# EAGLE board board (EAGLE 9.7.0)
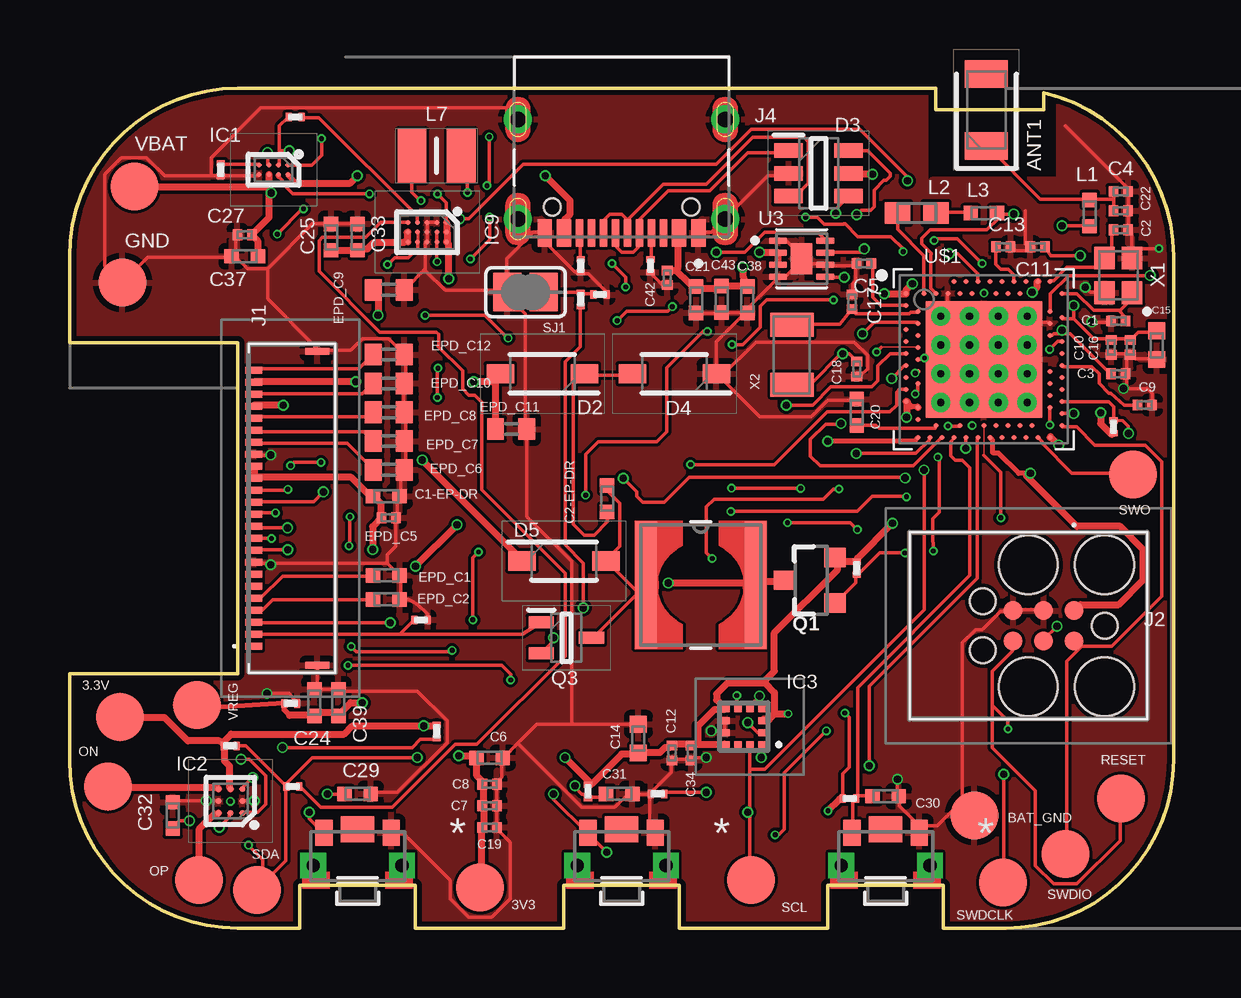
[diagram p0: board, top side]
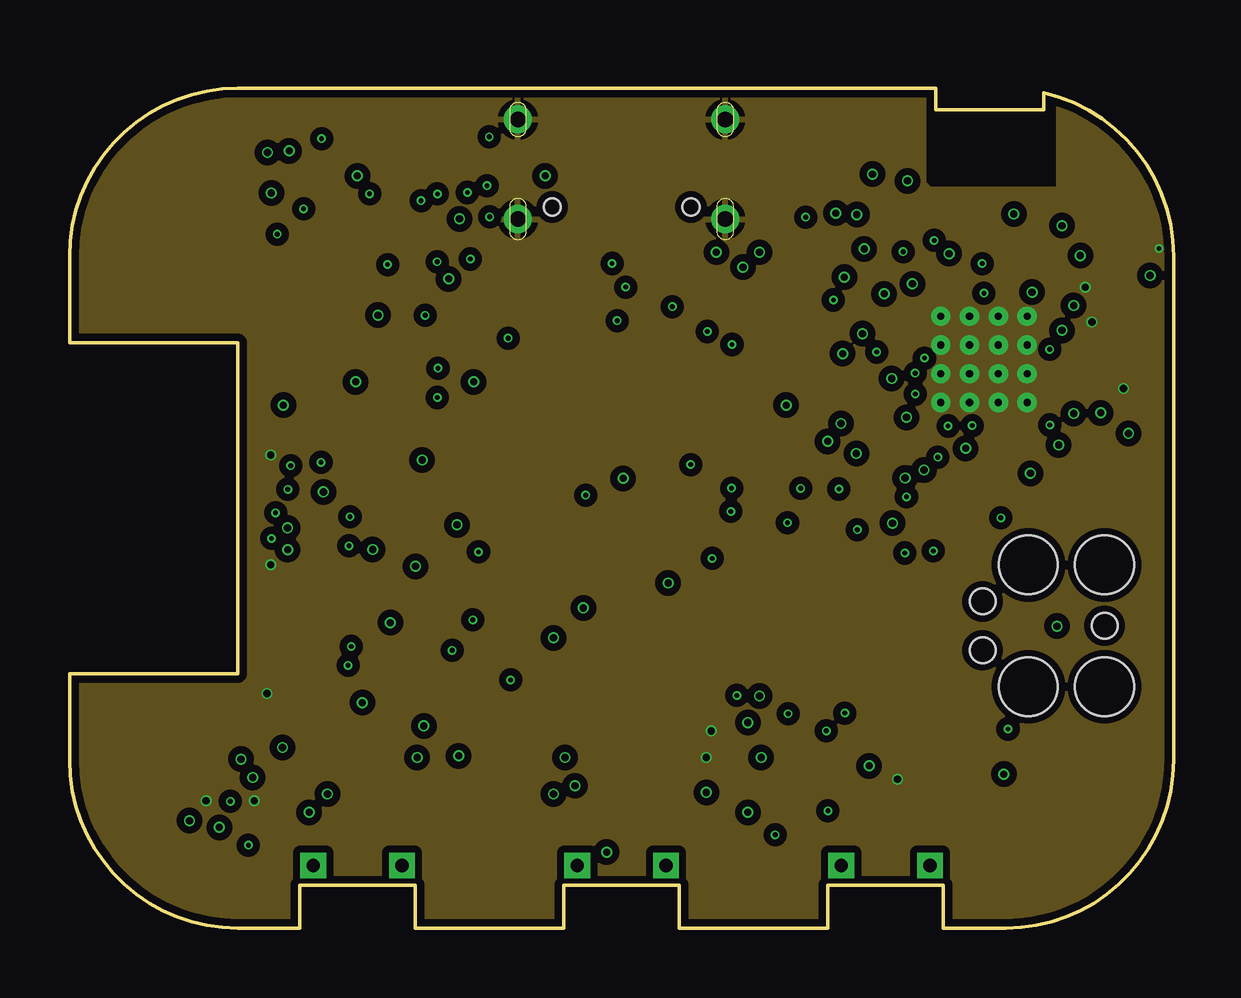
[diagram p1: board, inner layer Route2]
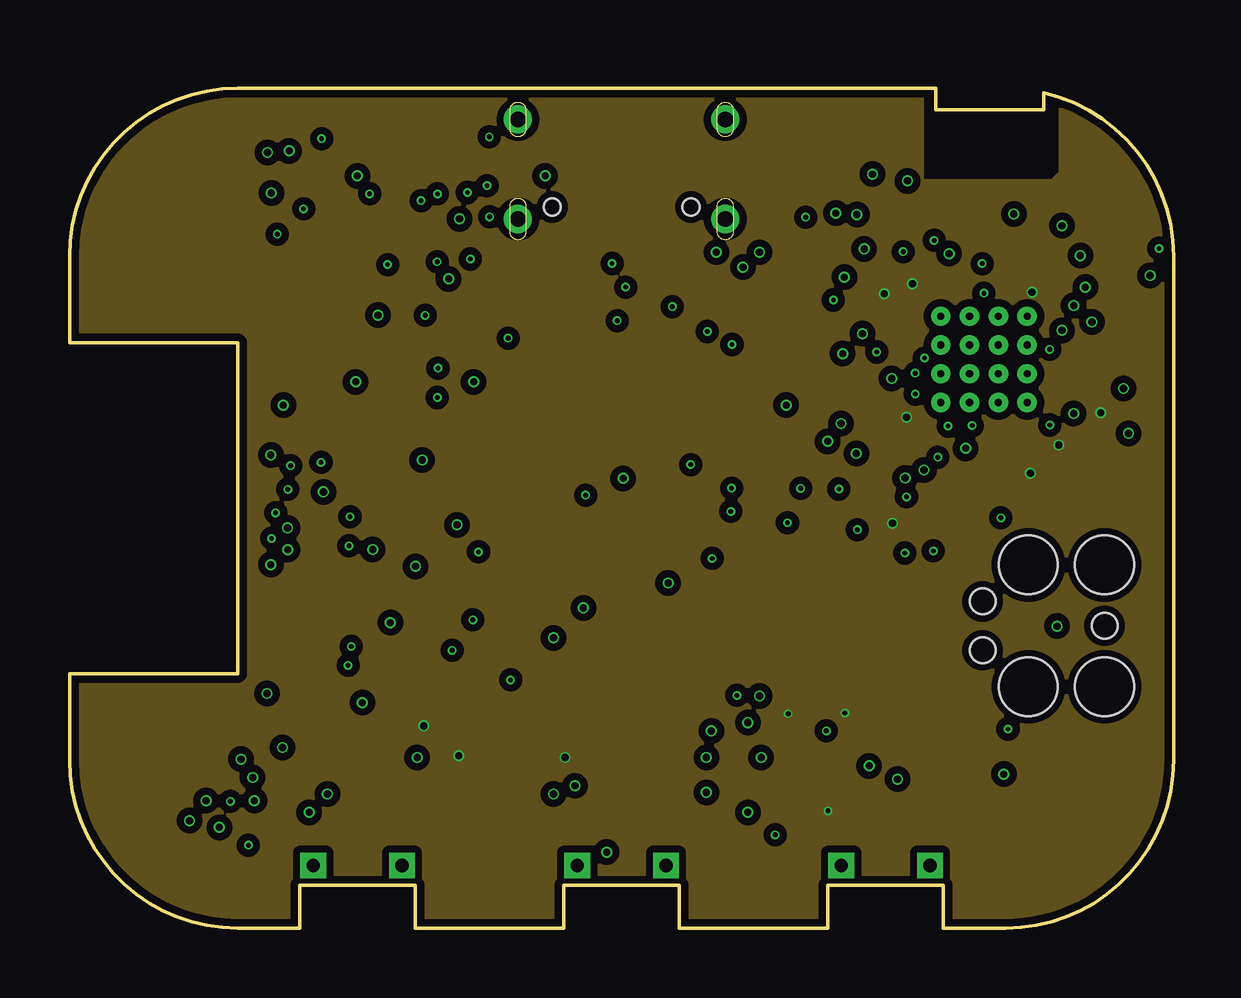
[diagram p2: board, inner layer Route15]
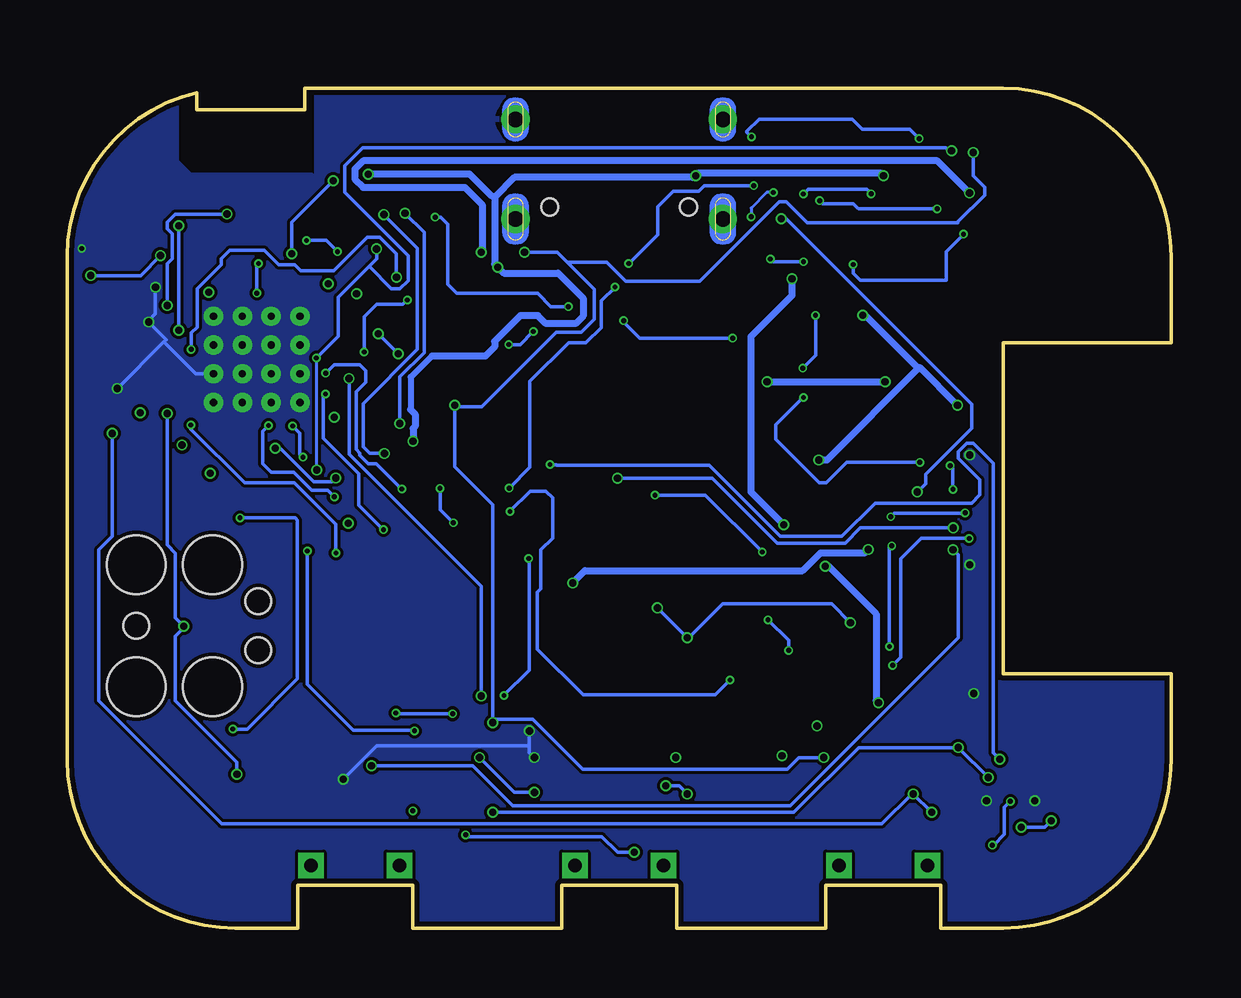
[diagram p3: board, bottom side, seen from below]

Size 46 x 35 mm. Coordinates in mm from the lower left corner, seen from the top.
Outline: 0,10.6 0,7 arc90 7,0 9.6,0 9.6,1.8 14.4,1.8 14.4,0 20.6,0 20.6,1.8 25.4,1.8 25.4,0 31.6,0 31.6,1.8 36.4,1.8 36.4,0 39,0 arc90 46,7 46,28 arc77 40.6,34.81 40.6,34.1 36.1,34.1 36.1,35 7,35 arc90 0,28 0,24.4 7,24.4 7,10.6 0,10.6
Copper layers (1+2*15+16): Top 0.035mm / dielectric 1.6mm / Route2 0.035mm / dielectric 0.15mm / Route15 0.035mm / dielectric 0.2mm / Bottom 0.035mm
Design rules "jlcpcb-2layers.dru *": minimum track width 5mil, minimum drill 0.2mm, track to track 5mil, track to pad 5mil, pad to pad 5mil, via to via 5mil, smd to smd 5mil, copper to edge 0.2mm, drill to drill 6mil, minimum pad ring 10mil, minimum via ring 3mil, stop-mask expansion 4mil, vias tented up to drill 999mm, thermal gap 10mil
Net classes: 0 default: width 0.15 mm; 1 HIGH_CURRENT: width 0.3 mm

## Footprints (pad centres in the part's own frame; a part is rotated, then mirrored left to right if it is on the bottom)
HECTOR_WATCH_1_TP20R = smd 2 x 2: TP 0,0
2450AT18B100E_ANTC3216X140N = smd 1.15 x 1.8: 1 -1.5,0; 2 1.5,0
NORDIC_NRF_3_RESC0201_N = smd 0.4 x 0.45: 1 -0.305,0; 2 0.305,0
NORDIC_NRF_3_RESC0402_N = smd 0.6 x 0.6: 1 -0.55,0; 2 0.55,0
NORDIC_NRF_3_RESC0402_M = smd 0.7 x 0.7: 1 -0.6,0; 2 0.6,0
GRM011R60J152KE01L_1_0201 = smd 0.35 x 0.25: 1 0,0.275; 2 0,-0.275
ESP32_C6_LIBRARY_5_SOD3716X135N = smd 1.15 x 0.8: 1 -1.75,0; 2 1.75,0
ESP32_C6_LIBRARY_3_SOT95P280X145-6N = smd 1.2 x 0.6: 1 -1.25,0.95; 2 -1.25,0; 3 -1.25,-0.95; 4 1.25,-0.95; 5 1.25,0; 6 1.25,0.95
ESP32_C6_LIBRARY_1_ESP32_WROVER_EAGLE-LTSPICE_C0402 = smd 0.7 x 0.9: 1 -0.65,0; 2 0.65,0
BQ25180YBGR_BGA8C40P2X4_100X155X50 = smd 0.2 x 0.2: A1 -0.2,0.6; A2 0.2,0.6; B1 -0.2,0.2; B2 0.2,0.2; C1 -0.2,-0.2; C2 0.2,-0.2; D1 -0.2,-0.6; D2 0.2,-0.6
DRV2605YZFR_BGA9C50P3X3_144X144X62 = smd 0.25 x 0.25: A1 -0.5,0.5; A2 0,0.5; A3 0.5,0.5; B1 -0.5,0; B2 0,0; B3 0.5,0; C1 -0.5,-0.5; C2 0,-0.5; C3 0.5,-0.5
BMA423_BMA423 = smd 0.3 x 0.35: 1 -0.75,-0.775; 2 -0.25,-0.775; 3 0.25,-0.775; 4 0.75,-0.775; 7 0.75,0.775; 8 0.25,0.775; 9 -0.25,0.775; 10 -0.75,0.775 | smd 0.35 x 0.3: 5 0.775,-0.25; 6 0.775,0.25; 11 -0.775,0.25; 12 -0.775,-0.25
RT6160AWSC_BGA15C40P3X5_140X230X60 = smd 0.216 x 0.216: A1 -0.4,0.8; A2 0,0.8; A3 0.4,0.8; B1 -0.4,0.4; B2 0,0.4; B3 0.4,0.4; C1 -0.4,0; C2 0,0; C3 0.4,0; D1 -0.4,-0.4; D2 0,-0.4; D3 0.4,-0.4; E1 -0.4,-0.8; E2 0,-0.8; E3 0.4,-0.8
503480-2400_5034802400 = smd 0.3 x 0.7: 1 -5.75,1.525; 2 -5.25,1.525; 3 -4.75,1.525; 4 -4.25,1.525; 5 -3.75,1.525; 6 -3.25,1.525; 7 -2.75,1.525; 8 -2.25,1.525; 9 -1.75,1.525; 10 -1.25,1.525; 11 -0.75,1.525; 12 -0.25,1.525; 13 0.25,1.525; 14 0.75,1.525; 15 1.25,1.525; 16 1.75,1.525; 17 2.25,1.525; 18 2.75,1.525; 19 3.25,1.525; 20 3.75,1.525; 21 4.25,1.525; 22 4.75,1.525; 23 5.25,1.525; 24 5.75,1.525 | smd 0.3 x 1: MP1 -6.54,-1.125; MP2 6.54,-1.125
TC2030-IDC_TC2030IDC = smd 0.783 x 0.783: 1 -0.953,-0.635; 2 -0.953,0.635; 3 0.317,-0.635; 4 0.317,0.635; 5 1.588,-0.635; 6 1.588,0.635 | hole 2.451: -2.223,-2.54; -2.223,2.54; 0.952,-2.54; 0.952,2.54 | hole 1.067: -2.223,0; 2.857,-1.016; 2.857,1.016
KH-TYPE-C-16P_KINGHELM_KH-TYPE-C-16P = smd 0.6 x 1.15: A1_B12 -3.2,4.725; A4_B9 -2.4,4.725; A9_B4 2.4,4.725; A12_B1 3.2,4.725 | smd 0.3 x 1.15: A5 -1.25,4.725; A6 -0.25,4.725; A7 0.25,4.725; A8 1.25,4.725; B5 1.75,4.725; B6 0.75,4.725; B7 -0.75,4.725; B8 -1.75,4.725 | drill 0.65 pad 1.05: SH1 -4.32,0; SH2 4.32,0; SH3 -4.32,4.15; SH4 4.32,4.15 | hole 0.7: -2.89,3.65; 2.89,3.65
NORDIC_NRF_2_RESC0402_N = smd 0.6 x 0.6: 1 -0.55,0; 2 0.55,0
NORDIC_NRF_2_RESC0603_N = smd 1.05 x 0.9: 1 -0.8,0; 2 0.8,0
ESP32_C6_LIBRARY_2_IND_4828-WE-TPC_WRE = smd 0.9 x 5.3: 1 -2.286,0; 2 2.286,0
MLP2016SR47MT0S1_INDC2016X100N = smd 1.2 x 2.2: 1 -1.028,0; 2 1.028,0
ESP32_C6_LIBRARY_4_ESP32_C6_LIBRARY_4_ESP32_C6_LIBRARY_4_ESP32_C6_LIBRARY_4_ESP32_WROVER_SPARKFUN-DISCRETESEMI_SOT23-3 = smd 0.8 x 0.9: 1 -0.95,-1; 2 0.95,-1; 3 0,1.1
ESP32_C6_LIBRARY_6_SOT65P210X110-3N = smd 1.05 x 0.5: 1 -1.05,0.65; 2 -1.05,-0.65; 3 1.05,0
ERA-1AEB3401C_0201 = smd 0.35 x 0.25: 1 0,0.275; 2 0,-0.275
CPF0201D7K68C1_0201 = smd 0.35 x 0.25: 1 0,0.275; 2 0,-0.275
ESP32_C6_LIBRARY_7_JUMPER_SJ = smd 1.168 x 1.6: 1 -0.762,0; 2 0.762,0
2025-10-22_07-23-44_LIBRARY_SW_EVP-AKE31A_PAN = smd 0.711 x 1.092: 1 -1.4,-0.972; 2 1.4,-0.972 | drill 0.559 pad 0.914 square: 3 -1.848,0.381; 4 1.848,0.381 | smd 1.397 x 1.092: 5 0,-1.124
ESP32_C6_LIBRARY_SON50P200X200X80-9N = smd 0.76 x 0.27: 1 -0.985,0.75; 2 -0.985,0.25; 3 -0.985,-0.25; 4 -0.985,-0.75; 5 0.985,-0.75; 6 0.985,-0.25; 7 0.985,0.25; 8 0.985,0.75 | smd 0.9 x 1.3: 9 0,0
NORDIC_NRF_4_AQFN50P700X700X85_HS-74N = smd 4.85 x 4.85: P$74 0,0 | drill 0.3 pad 0.6: P$75 -1.8,1.8; P$76 -0.6,1.8; P$77 0.6,1.8; P$78 1.8,1.8; P$79 -1.8,0.6; P$80 -0.6,0.6; P$81 0.6,0.6; P$82 1.8,0.6; P$83 -1.8,-0.6; P$84 -0.6,-0.6; P$85 0.6,-0.6; P$86 1.8,-0.6; P$87 -1.8,-1.8; P$88 -0.6,-1.8; P$89 0.6,-1.8; P$90 1.8,-1.8 | smd 0.2 x 0.2: P$A8 -1.25,3.25; P$A10 -0.75,3.25; P$A12 -0.25,3.25; P$A14 0.25,3.25; P$A16 0.75,3.25; P$A18 1.25,3.25; P$A20 1.75,3.25; P$A22 2.25,3.25; P$A23 2.75,3.25; P$AA24 3.25,-2.25; P$AB2 -2.75,-2.5; P$AC5 -2,-2.75; P$AC9 -1,-2.75; P$AC11 -0.5,-2.75; P$AC13 0,-2.75; P$AC15 0.5,-2.75; P$AC17 1,-2.75; P$AC19 1.5,-2.75; P$AC21 2,-2.75; P$AC24 3.25,-2.75; P$AD2 -2.75,-3.25; P$AD4 -2.25,-3.25; P$AD6 -1.75,-3.25; P$AD8 -1.25,-3.25; P$AD10 -0.75,-3.25; P$AD12 -0.25,-3.25; P$AD14 0.25,-3.25; P$AD16 0.75,-3.25; P$AD18 1.25,-3.25; P$AD20 1.75,-3.25; P$AD22 2.25,-3.25; P$AD23 2.75,-3.25; P$B1 -3.25,2.75; P$B3 -2.5,2.75; P$B5 -2,2.75; P$B7 -1.5,2.75; P$B9 -1,2.75; P$B11 -0.5,2.75; P$B13 0,2.75; P$B15 0.5,2.75; P$B17 1,2.75; P$B19 1.5,2.75; P$B24 3.25,2.75; P$C1 -3.25,2.25; P$D2 -2.75,2; P$D23 2.75,2; P$E24 3.25,1.75; P$F2 -2.75,1.5; P$F23 2.75,1.5; P$G1 -3.25,1.25; P$H2 -2.75,1; P$H23 2.75,1; P$J1 -3.25,0.75; P$J24 3.25,0.75; P$K2 -2.75,0.5; P$L1 -3.25,0.25; P$L24 3.25,0.25; P$M2 -2.75,0; P$N1 -3.25,-0.25; P$N24 3.25,-0.25; P$P2 -2.75,-0.5; P$P23 2.75,-0.5; P$R1 -3.25,-0.75; P$R24 3.25,-0.75; P$T2 -2.75,-1; P$T23 2.75,-1; P$U1 -3.25,-1.25; P$U24 3.25,-1.25; P$V23 2.75,-1.5; P$W1 -3.25,-1.75; P$W24 3.25,-1.75; P$Y2 -2.75,-2; P$Y23 2.75,-2
NORDIC_NRF_BT-XTAL_2016_N = smd 0.95 x 0.85: 1 -0.725,-0.575; 2 0.725,-0.575; 3 0.725,0.575; 4 -0.725,0.575
NORDIC_NRF_1_XTAL_3215_N = smd 1 x 1.8: 1 -1.25,0; 2 1.25,0

## Placement (x,y rotation side)
3.3V  HECTOR_WATCH_1_TPTP20R  [HECTOR_WATCH_1_TP20R]  2.1,8.8 0 top
3V3  HECTOR_WATCH_1_TPTP20R  [HECTOR_WATCH_1_TP20R]  17.1,1.7 0 top
ANT1  2450AT18B100E  [2450AT18B100E_ANTC3216X140N]  38.2,34.1 90 top
BAT_GND  HECTOR_WATCH_1_TPTP20R  [HECTOR_WATCH_1_TP20R]  37.7,4.7 0 top
C1  12pF  [NORDIC_NRF_3_RESC0201_N]  43.7,25.3 180 top
C1-EP-DR  10uF  [NORDIC_NRF_3_RESC0402_N]  13.2,18 0 top
C2  12pF  [NORDIC_NRF_3_RESC0201_N]  43.8,29.1 0 top
C2-EP-DR  4.7uF/25V  [NORDIC_NRF_3_RESC0402_N]  22.4,17.9 90 top
C3  1pF  [NORDIC_NRF_3_RESC0201_N]  43.7,23.1 0 top
C4  1pF  [NORDIC_NRF_3_RESC0201_N]  43.8,30.7 0 top
C5  100nF  [NORDIC_NRF_3_RESC0201_N]  33.1,27.7 180 top
C6  4.7µF  [NORDIC_NRF_3_RESC0402_N]  17.5,7.1 0 top
C7  100nF  [NORDIC_NRF_3_RESC0201_N]  17.5,5.1 0 top
C8  100nF  [NORDIC_NRF_3_RESC0201_N]  17.5,6 0 top
C9  820pF N.C.  [NORDIC_NRF_3_RESC0201_N]  44.8,21.8 0 top
C10  N.C  [NORDIC_NRF_3_RESC0201_N]  43.4,24.2 270 top
C11  100pF  [NORDIC_NRF_3_RESC0201_N]  40.34,28.39 180 top
C12  100nF  [NORDIC_NRF_3_RESC0201_N]  25.1,7.3 270 top
C13  N.C  [NORDIC_NRF_3_RESC0201_N]  38.9,28.39 0 top
C14  4.7µF  [NORDIC_NRF_3_RESC0402_M]  23.7,7.9 90 top
C15  1.0µF  [NORDIC_NRF_3_RESC0402_M]  45.3,24.3 270 top
C16  47nF  [NORDIC_NRF_3_RESC0201_N]  44.2,24.2 270 top
C17  12pF  [NORDIC_NRF_3_RESC0201_N]  32.6,26.1 270 top
C18  12pF  [NORDIC_NRF_3_RESC0201_N]  32.8,23.3 90 top
C19  100nF  [NORDIC_NRF_3_RESC0201_N]  17.5,4.2 0 top
C20  4.7µF  [NORDIC_NRF_3_RESC0402_N]  32.8,21.5 90 top
C21  4.7µF  [NORDIC_NRF_3_RESC0402_N]  26.11,26.19 270 top
C22  N.C.  [NORDIC_NRF_3_RESC0201_N]  43.8,29.9 0 top
C23  0.1uF  [GRM011R60J152KE01L_1_0201]  9.21,9.37 270 top
C24  10uF  [NORDIC_NRF_3_RESC0402_N]  10.2,9.4 270 top
C25  22uF  [NORDIC_NRF_3_RESC0402_N]  10.9,28.8 90 top
C27  0.1uF  [NORDIC_NRF_3_RESC0201_N]  7.3,28.9 180 top
C29  1uF  [NORDIC_NRF_3_RESC0402_N]  12,5.6 0 top
C30  1uF  [NORDIC_NRF_3_RESC0402_N]  34,5.5 0 top
C31  1uF  [NORDIC_NRF_3_RESC0402_N]  22.9,5.6 0 top
C32  1uF  [NORDIC_NRF_3_RESC0402_N]  4.3,4.7 90 top
C33  22uF  [NORDIC_NRF_3_RESC0402_N]  12,28.8 90 top
C34  0.1uF  [NORDIC_NRF_3_RESC0201_N]  25.9,7.3 270 top
C37  1uF  [NORDIC_NRF_3_RESC0402_N]  7.3,28 180 top
C38  1uF  [NORDIC_NRF_3_RESC0402_N]  28.25,26.19 270 top
C39  10uF  [NORDIC_NRF_3_RESC0402_N]  11.2,9.4 90 top
C42  0.1uF  [NORDIC_NRF_3_RESC0201_N]  24.9,27.1 270 top
C43  4.7uF  [NORDIC_NRF_3_RESC0402_N]  27.17,26.2 270 top
D2  MBR0530  [ESP32_C6_LIBRARY_5_SOD3716X135N]  19.7,23.1 180 top
D3  ESP32_C6_LIBRARY_3_USBLC6-2SC6Y  [ESP32_C6_LIBRARY_3_SOT95P280X145-6N]  31.21,31.45 0 top
D4  MBR0530  [ESP32_C6_LIBRARY_5_SOD3716X135N]  25.2,23.1 180 top
D5  MBR0530  [ESP32_C6_LIBRARY_5_SOD3716X135N]  20.6,15.3 0 top
EPD_C1  1uF/50V  [NORDIC_NRF_3_RESC0402_N]  13.2,14.7 180 top
EPD_C2  1uF/50V  [NORDIC_NRF_3_RESC0402_N]  13.2,13.7 180 top
EPD_C5  0.1uF/50V  [NORDIC_NRF_3_RESC0201_N]  13.3,17.1 180 top
EPD_C6  1uF/50V  [ESP32_C6_LIBRARY_1_ESP32_WROVER_EAGLE-LTSPICE_C0402]  13.3,19.1 180 top
EPD_C7  1uF/50V  [ESP32_C6_LIBRARY_1_ESP32_WROVER_EAGLE-LTSPICE_C0402]  13.3,20.3 180 top
EPD_C8  1uF/50V  [ESP32_C6_LIBRARY_1_ESP32_WROVER_EAGLE-LTSPICE_C0402]  13.3,21.5 180 top
EPD_C9  1uF/50V  [ESP32_C6_LIBRARY_1_ESP32_WROVER_EAGLE-LTSPICE_C0402]  13.3,26.6 180 top
EPD_C10  1uF/50V  [ESP32_C6_LIBRARY_1_ESP32_WROVER_EAGLE-LTSPICE_C0402]  13.3,22.7 180 top
EPD_C11  1uF/50V  [ESP32_C6_LIBRARY_1_ESP32_WROVER_EAGLE-LTSPICE_C0402]  18.4,20.8 180 top
EPD_C12  1uF/50V  [ESP32_C6_LIBRARY_1_ESP32_WROVER_EAGLE-LTSPICE_C0402]  13.3,23.9 180 top
GND  HECTOR_WATCH_1_TPTP20R  [HECTOR_WATCH_1_TP20R]  2.2,26.9 0 top
IC1  BQ25180YBGR  [BQ25180YBGR_BGA8C40P2X4_100X155X50]  8.5,31.6 270 top
IC2  DRV2605YZFR  [DRV2605YZFR_BGA9C50P3X3_144X144X62]  6.7,5.3 180 top
IC3  BMA423  [BMA423_BMA423]  28.1,8.4 90 top
IC9  RT6160AWSC  [RT6160AWSC_BGA15C40P3X5_140X230X60]  14.9,29 270 top
J1  503480-2400  [503480-2400_5034802400]  9.2,17.5 90 top
J2  TC2030-IDC_TC2030-IDC  [TC2030-IDC_TC2030IDC]  40.9,12.6 180 top
J4  KH-TYPE-C-16P  [KH-TYPE-C-16P_KINGHELM_KH-TYPE-C-16P]  23,33.7 180 top
L1  3.9nH  [NORDIC_NRF_2_RESC0402_N]  42.5,29.8 90 top
L2  10µH  [NORDIC_NRF_2_RESC0603_N]  35.3,29.8 0 top
L3  15nH  [NORDIC_NRF_2_RESC0402_N]  38.1,29.8 0 top
L5  68uH  [ESP32_C6_LIBRARY_2_IND_4828-WE-TPC_WRE]  26.3,14.3 0 top
L7  FTC252012SR47MBCA  [MLP2016SR47MT0S1_INDC2016X100N]  15.29,32.19 180 top
ON  HECTOR_WATCH_1_TPTP20R  [HECTOR_WATCH_1_TP20R]  1.6,5.9 0 top
OP  HECTOR_WATCH_1_TPTP20R  [HECTOR_WATCH_1_TP20R]  5.4,2 0 top
Q1  3.1A/30V/105mΩ  [ESP32_C6_LIBRARY_4_ESP32_C6_LIBRARY_4_ESP32_C6_LIBRARY_4_ESP32_C6_LIBRARY_4_ESP32_WROVER_SPARKFUN-DISCRETESEMI_SOT23-3]  30.9,14.5 90 top
Q3  SI1308EDL-T1-GE3  [ESP32_C6_LIBRARY_6_SOT65P210X110-3N]  20.7,12.1 0 top
R1  0  [ERA-1AEB3401C_0201]  9.3,5.9 90 top
R1_EP_DR  0.47  [CPF0201D7K68C1_0201]  21.3,26.2 0 top
R1_USB  5K1  [ERA-1AEB3401C_0201]  24.2,27.6 180 top
R2_EP_DR  10K  [CPF0201D7K68C1_0201]  14.64,12.85 270 top
R2_USB  5K1  [ERA-1AEB3401C_0201]  21.3,27.6 0 top
R3  0  [ERA-1AEB3401C_0201]  24.5,5.6 90 top
R4  0  [ERA-1AEB3401C_0201]  9.4,33.8 90 top
R5  10K  [CPF0201D7K68C1_0201]  32.5,5.4 270 top
R7  10K  [ERA-1AEB3401C_0201]  43.5,20.9 0 top
R8  10K  [CPF0201D7K68C1_0201]  21.6,5.7 180 top
R9  10K  [CPF0201D7K68C1_0201]  6.3,31.6 180 top
R17  3K3  [CPF0201D7K68C1_0201]  15.3,8.2 0 top
R18  3K3  [CPF0201D7K68C1_0201]  6.7,7.6 90 top
R_PWR_EPD  10K  [ERA-1AEB3401C_0201]  32.8,15 180 top
R_TYPE_SEL  2.2  [ERA-1AEB3401C_0201]  22.1,26.4 270 top
RESET  HECTOR_WATCH_1_TPTP20R  [HECTOR_WATCH_1_TP20R]  43.8,5.4 0 top
SCL  HECTOR_WATCH_1_TPTP20R  [HECTOR_WATCH_1_TP20R]  28.4,2 0 top
SDA  HECTOR_WATCH_1_TPTP20R  [HECTOR_WATCH_1_TP20R]  7.8,1.6 0 top
SJ1  [ESP32_C6_LIBRARY_7_JUMPER_SJ]  19,26.5 0 top
SW_DN  2025-10-22_07-23-44_LIBRARY_EVP-AKE31ASW_EVP-AKE31A_PAN  [2025-10-22_07-23-44_LIBRARY_SW_EVP-AKE31A_PAN]  12,3 180 top
SW_ENT  2025-10-22_07-23-44_LIBRARY_EVP-AKE31ASW_EVP-AKE31A_PAN  [2025-10-22_07-23-44_LIBRARY_SW_EVP-AKE31A_PAN]  23,3 180 top
SW_UP  2025-10-22_07-23-44_LIBRARY_EVP-AKE31ASW_EVP-AKE31A_PAN  [2025-10-22_07-23-44_LIBRARY_SW_EVP-AKE31A_PAN]  34,3 180 top
SWDCLK  HECTOR_WATCH_1_TPTP20R  [HECTOR_WATCH_1_TP20R]  38.9,1.9 0 top
SWDIO  HECTOR_WATCH_1_TPTP20R  [HECTOR_WATCH_1_TP20R]  41.5,3.1 0 top
SWO  HECTOR_WATCH_1_TPTP20R  [HECTOR_WATCH_1_TP20R]  44.3,18.9 0 top
U3  MAX17048G+T10  [ESP32_C6_LIBRARY_SON50P200X200X80-9N]  30.5,27.9 0 top
U$1  NORDIC_NRF_4_NRF52840_QF  [NORDIC_NRF_4_AQFN50P700X700X85_HS-74N]  38.1,23.7 0 top
VBAT  HECTOR_WATCH_1_TPTP20R  [HECTOR_WATCH_1_TP20R]  2.7,30.9 0 top
VREG  HECTOR_WATCH_1_TPTP20R  [HECTOR_WATCH_1_TP20R]  5.3,9.3 0 top
X1  32MHz  [NORDIC_NRF_BT-XTAL_2016_N]  43.7,27.2 90 top
X2  32.768kHz  [NORDIC_NRF_1_XTAL_3215_N]  30.1,23.9 270 top

## Library data of the parts
3.3V 3V3 BAT_GND C1 C1-EP-DR C2 C2-EP-DR C3-C22 C24 C25 C27 C29-C34 C37-C39 C42 C43 EPD_C1 EPD_C2 EPD_C5 GND L1-L3 ON OP R1 R1_EP_DR R1_USB R2_EP_DR R2_USB R3-R5 R7-R9 R17 R18 R_PWR_EPD R_TYPE_SEL RESET SCL SDA SJ1 SWDCLK SWDIO SWO U$1 VBAT VREG X1 X2 = InkTime_v5
ANT1 = InkTime_v5; ARROW_PART_NUMBER: 2450AT18B100E; ARROW_PRICE-STOCK: https://www.arrow.com/en/products/2450at18b100e/johanson-dielectrics?utm_currency=USD&region=nac; DESCRIPTION: Antennas 2.45GHz ANTENNA; HEIGHT: 1.4mm; MANUFACTURER_NAME: JOHANSON TECHNOLOGY; MANUFACTURER_PART_NUMBER: 2450AT18B100E; MOUSER_PART_NUMBER: 609-2450AT18B100E; MOUSER_PRICE-STOCK: https://www.mouser.co.uk/ProductDetail/Johanson-Technology/2450AT18B100E?qs=yCnrNFeXz%252Bh5MFsFIXGZGA%3D%3D
C23 = InkTime_v5; AVAILABILITY: In Stock; CHECK_PRICES: https://www.snapeda.com/parts/GRM011R60J152KE01L/Murata/view-part/?ref=eda; DESCRIPTION: SMD Capacitor X5R(EIA) with Capacitance: 1500pF Tol. 10%. Rated Voltage: 6.3Vdc; MF: Murata; MP: GRM011R60J152KE01L; PACKAGE: 0201 Murata; PRICE: None; SNAPEDA_LINK: https://www.snapeda.com/parts/GRM011R60J152KE01L/Murata/view-part/?ref=snap
D2 D4 D5 = InkTime_v5; AVAILABILITY: In Stock; CHECK_PRICES: https://www.snapeda.com/parts/MBR0530/Onsemi/view-part/?ref=eda; DESCRIPTION: Diode Schottky 30 V 500mA Surface Mount SOD-123; MF: ON Semiconductor; MP: MBR0530; PACKAGE: SOD-123-2 ON Semiconductor; PRICE: None; PURCHASE-URL: https://www.snapeda.com/api/url_track_click_mouser/?unipart_id=179458&manufacturer=ON Semiconductor&part_name=MBR0530&search_term=None; SNAPEDA_LINK: https://www.snapeda.com/parts/MBR0530/Onsemi/view-part/?ref=snap
D3 = InkTime_v5; AVAILABILITY: In Stock; CHECK_PRICES: https://www.snapeda.com/parts/USBLC6-2SC6Y/STMicroelectronics/view-part/?ref=eda; DESCRIPTION: 17V Clamp 5A (8/20µs) Ipp Tvs Diode Surface Mount SOT-23-6; MF: STMicroelectronics; MP: USBLC6-2SC6Y; PACKAGE: SOT-23-6 STMicroelectronics; PRICE: None; SNAPEDA_LINK: https://www.snapeda.com/parts/USBLC6-2SC6Y/STMicroelectronics/view-part/?ref=snap
EPD_C6-EPD_C12 = InkTime_v5; SPICEMODEL: NONE; SPICEPREFIX: C
IC1 = InkTime_v5; ARROW_PART_NUMBER: BQ25180YBGR; ARROW_PRICE-STOCK: https://www.arrow.com/en/products/bq25180ybgr/texas-instruments?utm_currency=USD&region=nac; DESCRIPTION: Charger IC Lithium Ion/Polymer, Lithium Iron Phosphate 8-DSBGA (1.6x1.1); HEIGHT: 0.5mm; MANUFACTURER_NAME: Texas Instruments; MANUFACTURER_PART_NUMBER: BQ25180YBGR; MOUSER_PART_NUMBER: 595-BQ25180YBGR; MOUSER_PRICE-STOCK: https://www.mouser.co.uk/ProductDetail/Texas-Instruments/BQ25180YBGR?qs=doiCPypUmgEWjAK%252BJAX6Tw%3D%3D
IC2 = InkTime_v5; ARROW_PART_NUMBER: DRV2605YZFR; ARROW_PRICE-STOCK: https://www.arrow.com/en/products/drv2605yzfr/texas-instruments?region=nac; DESCRIPTION: Haptic Driver for ERM/LRA with Built-In Library and Smart Loop Architecture; HEIGHT: 0.625mm; MANUFACTURER_NAME: Texas Instruments; MANUFACTURER_PART_NUMBER: DRV2605YZFR
IC3 = InkTime_v5; ARROW_PART_NUMBER: BMA423; ARROW_PRICE-STOCK: https://www.arrow.com/en/products/bma423/bosch; DESCRIPTION: Accelerometers Triaxial low-g 12bit Acceleration Sensor; HEIGHT: 1mm; MANUFACTURER_NAME: BOSCH; MANUFACTURER_PART_NUMBER: BMA423; MOUSER_PART_NUMBER: 262-BMA423; MOUSER_PRICE-STOCK: https://www.mouser.co.uk/ProductDetail/Bosch-Sensortec/BMA423?qs=HXFqYaX1Q2xC%252BSgeGoX3mg%3D%3D
IC9 = InkTime_v5; DESCRIPTION: Buck-Boost Regulator Positive Output Step-Up/Step-Down I2C DC-DC Controller IC 15-WL-CSP (BSC) (1.4x2.3); HEIGHT: 0.6mm; MANUFACTURER_NAME: RICHTEK; MANUFACTURER_PART_NUMBER: RT6160AWSC; MOUSER_PART_NUMBER: 835-RT6160AWSC; MOUSER_PRICE-STOCK: https://www.mouser.co.uk/ProductDetail/Richtek/RT6160AWSC?qs=amGC7iS6iy%2FLd9PSoixZXQ%3D%3D
J1 = InkTime_v5; DESCRIPTION: FFC & FPC Connectors 0.5mm FPC RA SMT Dual Contact 24Ckt; HEIGHT: 1.87mm; MANUFACTURER_NAME: Molex; MANUFACTURER_PART_NUMBER: 503480-2400; MOUSER_PART_NUMBER: 538-503480-2400; MOUSER_PRICE-STOCK: https://www.mouser.co.uk/ProductDetail/Molex/503480-2400?qs=OAhjpuo3Vu7efIoxFh9AOw%3D%3D
J2 = InkTime_v5; DESCRIPTION: CABLE ADAPTER 6 POS; HEIGHT: 19mm; MANUFACTURER_NAME: Tag Connect; MANUFACTURER_PART_NUMBER: TC2030-IDC
J4 = InkTime_v5; AVAILABILITY: Not in stock; CHECK_PRICES: https://www.snapeda.com/parts/KH-TYPE-C-16P/Kinghelm/view-part/?ref=eda; MF: kinghelm; MP: KH-TYPE-C-16P; PACKAGE: None; PRICE: None; SNAPEDA_LINK: https://www.snapeda.com/parts/KH-TYPE-C-16P/Kinghelm/view-part/?ref=snap
L5 = InkTime_v5; COPYRIGHT: Copyright (C) 2024 Ultra Librarian. All rights reserved.; MANUFACTURER_PART_NUMBER: 744043680; MFR_NAME: Wurth Electronics
L7 = InkTime_v5; DESCRIPTION: SMD / SMT Inductors (Coils), L=0.47?H, L x W x T :; HEIGHT: 1mm; JLCPCB: https://jlcpcb.com/partdetail/6763488-FTC252012SR47MBCA/C5832368; MANUFACTURER_NAME: TDK; MANUFACTURER_PART_NUMBER: FTC252012SR47MBCA
Q1 = InkTime_v5; PROD_ID: TRANS-11308
Q3 = InkTime_v5; AVAILABILITY: In Stock; CHECK_PRICES: https://www.snapeda.com/parts/SI1308EDL-T1-GE3/Vishay+Siliconix/view-part/?ref=eda; DESCRIPTION: Si1308EDL-T1-GE3 N-channel MOSFET Transistor, 1.5 A, 30 V, 3-Pin SC-70 | Siliconix / Vishay SI1308EDL-T1-GE3; MF: Vishay Siliconix; MP: SI1308EDL-T1-GE3; PACKAGE: SOT-323 Vishay Semiconductor; PRICE: None; PURCHASE-URL: https://www.snapeda.com/api/url_track_click_mouser/?unipart_id=274603&manufacturer=Vishay Siliconix&part_name=SI1308EDL-T1-GE3&search_term=None; SNAPEDA_LINK: https://www.snapeda.com/parts/SI1308EDL-T1-GE3/Vishay+Siliconix/view-part/?ref=snap
SW_DN SW_ENT SW_UP = InkTime_v5; COPYRIGHT: Copyright (C) 2025 Ultra Librarian. All rights reserved.; DIGI-KEY_PART_NUMBER_1: P123437TR-ND; DIGI-KEY_PART_NUMBER_2: P123437CT-ND; DIGI-KEY_PART_NUMBER_3: P123437DKR-ND; MANUFACTURER_NAME: Panasonic; MANUFACTURER_PART_NUMBER: EVP-AKE31A
U3 = InkTime_v5; AVAILABILITY: In Stock; CHECK_PRICES: https://www.snapeda.com/parts/MAX17048G+T10/Analog+Devices/view-part/?ref=eda; DESCRIPTION: 3µA 1-Cell/2-Cell Fuel Gauge with ModelGauge; MF: Analog Devices; MP: MAX17048G+T10; PACKAGE: TDFN-8 Maxim; PRICE: None; PURCHASE-URL: https://www.snapeda.com/api/url_track_click_mouser/?unipart_id=329239&manufacturer=Analog Devices&part_name=MAX17048G+T10&search_term=None; SNAPEDA_LINK: https://www.snapeda.com/parts/MAX17048G+T10/Analog+Devices/view-part/?ref=snap

## Nets
3.3V [HIGH_CURRENT]: C25.1 C33.1 IC9.E2 IC9.E3
3V3 [HIGH_CURRENT]: 3.3V.TP 3V3.TP C6.1 C7.1 C8.1 C12.1 C14.1 C19.1 C34.1 IC2.C2 IC3.3 IC3.7 IC3.10 J2.1 Q1.2 R5.2 R7.2 R8.2 R17.1 R18.1 R_PWR_EPD.2 U$1.P$A22 U$1.P$AD14 U$1.P$AD23 U$1.P$B1 U$1.P$W1 U$1.P$Y2
ALERT: U3.5 U$1.P$J24
D+: D3.4 U$1.P$AD6
D-: D3.6 U$1.P$AD4
DEC3: C11.1 U$1.P$D23
DEC4_6: C10.1 C15.1 C16.1 L3.2 U$1.P$B5 U$1.P$E24
DN: D3.1 J4.A7 J4.B7
DP: D3.3 J4.A6 J4.B6
EPD_3V3 [HIGH_CURRENT]: C1-EP-DR.1 EPD_C5.2 J1.15 J1.16 L5.2 Q1.3
EPD_BUSY: J1.9 U$1.P$AD12
EPD_CS: J1.12 U$1.P$K2
EPD_DC: J1.11 U$1.P$AD10
EPD_RST: J1.10 U$1.P$AC11
GDR: J1.2 Q3.1 R2_EP_DR.2
GND: BAT_GND.TP C1-EP-DR.2 C1.2 C2.2 C3.2 C4.2 C5.2 C6.2 C7.2 C8.2 C9.2 C10.2 C11.2 C12.2 C13.2 C14.2 C15.2 C16.2 C17.1 C18.1 C19.2 C20.2 C21.2 C22.2 C23.1 C24.1 C25.2 C27.2 C29.2 C30.2 C31.2 C32.2 C33.2 C34.2 C37.2 C38.2 C39.2 C42.2 C43.2 D3.2 D4.1 EPD_C1.1 EPD_C2.1 EPD_C5.1 EPD_C6.1 EPD_C7.1 EPD_C8.1 EPD_C9.1 EPD_C10.1 EPD_C11.1 EPD_C12.1 GND.TP IC1.D2 IC2.B1 IC2.B3 IC3.8 IC3.9 IC9.B1 IC9.C1 IC9.C2 IC9.C3 J1.8 J1.17 J1.MP1 J1.MP2 J2.3 J2.5 J4.A1_B12 J4.A12_B1 J4.SH1 J4.SH2 J4.SH3 J4.SH4 R1_USB.1 R2_EP_DR.1 R2_USB.2 R3.1 R9.1 R_TYPE_SEL.1 SJ1.1 SW_DN.1 SW_ENT.1 SW_UP.1 U3.1 U3.4 U3.6 U3.9 U$1.P$74 U$1.P$75 U$1.P$76 U$1.P$77 U$1.P$78 U$1.P$79 U$1.P$80 U$1.P$81 U$1.P$82 U$1.P$83 U$1.P$84 U$1.P$85 U$1.P$86 U$1.P$87 U$1.P$88 U$1.P$89 U$1.P$90 U$1.P$B7 U$1.P$F23 X1.2 X1.4
HAPTIC_EN: IC2.A1 U$1.P$U1
IMU_INT1: IC3.5 U$1.P$N1
IMU_INT2: IC3.6 U$1.P$P2
LX1 [HIGH_CURRENT]: IC9.B2 IC9.B3 L7.1
LX2 [HIGH_CURRENT]: IC9.D2 IC9.D3 L7.2
MOSI: J1.14 U$1.P$B13
N$1: C5.1 U$1.P$C1
N$2: C17.2 U$1.P$D2 X2.1
N$3: IC1.D1 R9.2
N$4: C18.2 U$1.P$F2 X2.2
N$5: L2.1 U$1.P$B3
N$6: IC9.D1 R4.2
N$7: C20.1 U$1.P$AC5
N$8: IC9.E1 R1.2
N$10: IC3.1 R3.2
N$11: L2.2 L3.1
N$12: C13.1 U$1.P$A18
N$13: C2.1 U$1.P$A23 X1.3
N$14: C1.1 U$1.P$B24 X1.1
N$15: ANT1.1 C4.1 C22.1 L1.2
N$16: C3.1 L1.1 U$1.P$H23
N$17: C2-EP-DR.2 D5.2 L5.1 Q3.3
N$18: C2-EP-DR.1 D2.1 D4.2
N$19: C9.1 U$1.P$N24
N$20: R1_EP_DR.1 R_TYPE_SEL.2 SJ1.2
N$21: EPD_C12.2 J1.24
N$22: EPD_C6.2 J1.18
N$23: J4.A5 R1_USB.2
N$24: C32.1 IC2.A2
N$25: EPD_C10.2 J1.22
N$26: J4.B5 R2_USB.1
N$27: EPD_C8.2 J1.20
N$28: EPD_C7.2 J1.19
N$29: EPD_C2.2 J1.4
N$32: EPD_C1.2 J1.5
OUT+ [HIGH_CURRENT]: IC2.A3 OP.TP
OUT- [HIGH_CURRENT]: IC2.C3 ON.TP
P0.04: U$1.P$J1
P0.09: U$1.P$L24
P0.13: C30.1 R5.1 SW_UP.2 U$1.P$AD8
P0.14: C31.1 R8.1 SW_ENT.2 U$1.P$AC9
P0.19: U$1.P$AC15
P0.20: U$1.P$AD16
P0.21: U$1.P$AC17
P0.22: U$1.P$AD18
P0.23: U$1.P$AC19
P0.24: U$1.P$AD20
P0.25: U$1.P$AC21
P0.26: U$1.P$G1
P0.27: U$1.P$H2
P0.28: U$1.P$B11
P0.29: U$1.P$A10
P0.30: U$1.P$B9
P0.31: U$1.P$A8
P1.01: Q1.1 R_PWR_EPD.1 U$1.P$Y23
P1.02: C29.1 R7.1 SW_DN.2 U$1.P$W24
P1.03: U$1.P$V23
P1.04: U$1.P$U24
P1.05: U$1.P$T23
P1.06: U$1.P$R24
P1.07: U$1.P$P23
P1.09: U$1.P$R1
P1.10: U$1.P$A20
P1.11: U$1.P$B19
P1.12: U$1.P$B17
P1.13: U$1.P$A16
P1.14: U$1.P$B15
P1.15: U$1.P$A14
PMIC_INT: IC1.A1 U$1.P$T2
PREVGH [HIGH_CURRENT]: D5.1 EPD_C9.2 J1.21
PREVGL [HIGH_CURRENT]: D2.2 EPD_C11.2 J1.23
RESE: J1.3 Q3.2 R1_EP_DR.2
RESET: J2.6 RESET.TP U$1.P$AC13
SCK: J1.13 U$1.P$A12
SCL: IC1.B1 IC2.C1 IC3.12 R4.1 R17.2 SCL.TP U3.7 U$1.P$M2
SDA: IC1.C1 IC2.B2 IC3.2 R1.1 R18.2 SDA.TP U3.8 U$1.P$L1
SWDCLK: J2.4 SWDCLK.TP U$1.P$AA24
SWDIO: J2.2 SWDIO.TP U$1.P$AC24
SWO: SWO.TP U$1.P$AD22
VBAT [HIGH_CURRENT]: C27.1 C37.1 IC1.C2 U3.2 U3.3 VBAT.TP
VBUS [HIGH_CURRENT]: C21.1 C38.1 C42.1 C43.1 D3.5 IC1.A2 J4.A4_B9 J4.A9_B4 U$1.P$AD2
VREG [HIGH_CURRENT]: C23.2 C24.2 C39.1 IC1.B2 IC9.A1 IC9.A2 IC9.A3 VREG.TP

## Tracks (layer width: path | path; a pad name or v marks a point on that pad's centre or on a via)
3.3V
  Top 0.3: 14.07,28.65 14.07,28.99 IC9.E2 | 14.07,28.65 IC9.E3 | 14.07,28.65 13.93,28.58 12.68,28.58 12.4,28.3 12.06,28.3 C33.1 11.85,28.23 10.95,28.23 C25.1
3V3  (via drill 0.2, 0.3)
  Top 0.15: 32.09,5.38 32.21,5.38 | v32.3,8.96 32.48,8.79 32.48,6.7 32.23,6.44 R5.2
  Top 0.2: 35.33,21.72 35.08,21.72 34.86,21.95 | U$1.P$AD14 38.45,20.35 38.45,19.85
  Top 0.203: v40.03,18.95 39.55,18.95 38.7,19.8 38.5,19.8 38.45,19.85
  Top 0.3: 3V3.TP 17.11,1.71 17.18,1.78 17.18,4.07 C19.1 17.25,4.2 17.25,5.04 C7.1 17.25,5.24 17.25,5.94 C8.1 17.18,6.14 16.98,6.35 16.98,7.04 C6.1 16.84,7.18 v16.21,7.18 | IC2.C2 6.66,5.87 6.66,6.77 6.45,6.97 6.45,7.6 R18.1 6.38,7.74 | 6.38,7.74 6.73,8.08 11.44,8.08 11.78,8.43 v14.76,8.43 15.24,8.43 R17.1 | 3.3V.TP 2.16,8.77 3.96,8.77 4.93,7.8 6.24,7.8 6.38,7.74 | U$1.P$W1 34.86,21.95 34.91,21.93 34.87,21.9 v34.87,21.29 | 35.33,21.72 U$1.P$Y2 | J2.1 41.91,13.28 42.11,13.48 43.71,13.48 44.74,14.52 44.74,15.77 43.77,16.74 41.97,16.74 39.86,18.85 39.97,18.95 v40.03,18.95 | v41.21,20.13 40.87,20.48 U$1.P$AD23 | v33.94,26.43 34.84,26.43 | 34.84,26.43 U$1.P$B1 | v40.11,26.5 40.31,26.71 40.31,26.92 U$1.P$A22 | v35.12,26.85 34.84,26.57 34.84,26.43 | v42.96,21.48 42.96,21.02 43.4,20.59 43.46,20.59 R7.2 | 21.61,6.01 21.75,6.01 23,7.25 23.69,7.25 C14.1 23.83,7.32 24.59,7.32 24.8,7.53 25.01,7.53 C12.1 25.15,7.67 25.77,7.67 C34.1 25.91,7.67 26.19,7.67 | 21.61,6.01 R8.2 | 32.76,15.28 32.07,15.28 31.93,15.42 Q1.2 32,15.15 32,14.94 29.37,12.31 29.37,10.71 29.02,10.37 28.95,10.23 | 32.76,15.28 R_PWR_EPD.2 | 26.19,7.67 27.29,7.67 IC3.10 | 26.19,7.67 26.19,8.43 26.88,9.12 27.29,9.12 IC3.7 26.96,9.51 26.96,9.77 27.43,10.23 28.95,10.23 | 32.21,5.38 R5.2 | 29.37,8.91 29.16,8.71 28.89,8.71 IC3.3 | 29.37,8.91 29.37,9.81 28.95,10.23 | v34.29,16.88 32.83,15.42 32.76,15.28 | v20.65,7.11 21.61,6.14 21.61,6.01 | v31.6,4.89 32.09,5.38 | v29.94,8.94 29.92,8.91 29.37,8.91
  Bottom 0.15: v29.94,8.94 32.28,8.94 v32.3,8.96
  pour Route15 (isolate 0.305): -1.38,-0.6 -1.34,-0.61 -0.26,-1.7 48.26,-1.7 48.8,-1.16 48.8,35.36 48.66,35.5 41.34,35.5 41.3,35.46 41.3,31.48 41.29,31.44 40.96,31.11 40.92,31.1 35.58,31.1 35.54,31.11 35.51,31.14 35.5,31.18 35.5,34.96 32.21,38.24 32.2,38.28 32.2,38.5 -1.63,38.5 -1.6,38.44 -1.6,38.42 -1.6,38.42 -1.6,38.41 -1.6,38.4 -1.6,-0.52 -1.61,-0.56 -1.65,-0.6
ALERT  (via drill 0.2, 0.3)
  Top 0.15: U$1.P$J24 41.17,24.45 v40.84,24.12 | v32.28,27.13 31.52,27.13 U3.5
  Bottom 0.15: v40.84,24.12 40.84,24.8 40.59,25.05 40.59,26.64 39.59,27.64 39.59,27.89 39.22,28.26 37.8,28.26 37.19,27.65 36.52,27.65 36.26,27.39 34.9,27.39 33.5,28.79 32.97,28.79 32.28,28.09 v32.28,27.13
D+  (via drill 0.3)
  Top 0.15: v31.93,29.79 31.93,29.96 D3.4 | U$1.P$AD6 36.3,20.41 35.15,19.26 31.28,19.26 30.87,19.67 30.87,20.37 31.5,21 32.11,21 v32.14,21.03
  Bottom 0.15: v32.14,21.03 32.14,22.97 31.13,23.98 31.13,29 v31.93,29.79
D-  (via drill 0.3)
  Top 0.15: v32.78,19.78 35.25,19.78 35.81,20.34 35.81,20.41 U$1.P$AD4 | v32.8,29.73 32.99,29.93 33.38,29.93 33.52,30.07 33.52,30.75 33.93,31.16 34.03,31.16 34.2,31.34 34.2,31.46 33.27,32.4 D3.6
  Bottom 0.15: v32.78,19.78 33.38,19.78 33.67,20.07 33.67,21.86 31.41,24.12 31.41,28.34 v32.8,29.73
DEC3  (via drill 0.3)
  Top 0.15: v45.02,27.2 41.63,27.2 40.87,26.43 40.87,25.74 U$1.P$D23 | v42.11,28.03 40.88,28.03 C11.1
  Bottom 0.15: v45.02,27.2 42.94,27.2 v42.11,28.03
DEC4_6  (via drill 0.3)
  Top 0.15: 41.84,25.39 41.35,25.39 U$1.P$E24 | 41.84,25.39 42.67,24.56 43.36,24.56 C10.1 43.43,24.56 44.19,24.56 C16.1 44.26,24.56 44.54,24.84 45.3,24.84 C15.1 | U$1.P$B5 35.89,26.66 35.89,28.06 35.91,28.08 35.91,28.12 35.5,28.53 35.5,28.74 35.86,29.09 38.22,29.09 38.71,29.58 38.71,29.76 | v41.84,25.95 41.84,25.39 | 38.71,29.76 38.65,29.76 L3.2 | 38.71,29.76 v39.34,29.76
  Bottom 0.15: v41.84,25.95 41.84,27.68 41.63,27.89 41.63,28.93 41.84,29.13 41.84,29.41 41.49,29.76 v39.34,29.76
DN
  Top 0.15: J4.A7 22.79,28.93 22.79,28.37 23,28.16 23.48,28.16 23.69,28.37 23.69,28.93 J4.B7 23.76,28.99 23.76,29.55 24.94,30.73 26.67,30.73 28.26,32.32 29.89,32.32 D3.1
DP
  Top 0.15: J4.B6 22.31,28.99 22.31,29.55 22.52,29.76 23,29.76 23.21,29.55 23.21,28.99 J4.A6 23.28,29.55 24.73,31 26.53,31 28.48,32.95 30.61,32.95 30.78,32.77 30.78,31.03 30.27,30.52 29.97,30.52 D3.3
EPD_3V3  (via drill 0.3)
  Top 0.3: Q1.3 29.79,14.45 28.75,14.45 28.61,14.31 L5.2 28.47,14.38 v24.94,14.38 | J1.16 7.7,19.23 7.7,18.82 J1.15 7.71,18.78 11.74,18.78 12.54,17.98 C1-EP-DR.1 12.68,17.98 12.96,17.71 12.96,17.15 EPD_C5.2 12.63,16.73 v12.63,15.78
  Bottom 0.3: v24.94,14.38 24.43,14.9 15.35,14.9 14.62,15.63 12.77,15.63 v12.63,15.78
EPD_BUSY  (via drill 0.3)
  Top 0.15: v33.32,6.77 33.32,10.09 37.82,14.59 37.82,20.41 U$1.P$AD12 | v9.09,15.77 7.7,15.77 J1.9
  Bottom 0.15: v33.32,6.77 29.09,6.77 27.43,5.1 15.87,5.1 8.87,12.1 8.87,15.55 v9.09,15.77
EPD_CS  (via drill 0.2)
  Top 0.043: U$1.P$K2 33.82,24.2
  Top 0.15: 33.82,24.2 v33.63,24.01 | J1.12 7.73,17.3 v8.58,17.3 | v11.68,17.14 11.68,15.97 v11.64,15.93 | v11.74,11.74 11.95,11.53 15.89,11.53 v15.94,11.58 | v31.83,26.18 29.04,26.18 28.77,25.91 28.77,25.04 28.05,24.32 v27.6,24.32 | v26.57,24.86 26.4,24.86 24.88,23.34 24.88,20.69 24.46,20.27 22.02,20.27 21.5,19.75 v21.5,18.04 | v16.8,12.85 16.8,15.44 v17.04,15.68
  Bottom 0.15: v8.58,17.3 8.59,17.3 11.53,17.3 v11.68,17.14 | v11.64,15.93 11.74,15.84 v11.74,11.74 | v33.63,24.01 33.63,25.47 33.1,25.99 32.01,25.99 v31.83,26.18 | v27.6,24.32 27.12,24.32 v26.57,24.86 | v15.94,11.58 15.94,11.99 v16.8,12.85 | v17.04,15.68 19.4,18.04 v21.5,18.04
EPD_DC  (via drill 0.3)
  Top 0.15: v37.34,19.99 37.34,20.41 U$1.P$AD10 | v34.81,18.76 34.79,18.76 34.76,18.78 25.82,18.78 24.79,17.75 23.88,17.75 23.62,18 23.62,18.19 v23.07,18.75 | v9.08,16.68 8.03,16.68 7.97,16.74 7.7,16.74 J1.11
  Bottom 0.15: v37.34,19.99 37.13,19.99 35.73,18.6 34.98,18.6 v34.81,18.76 | v23.07,18.75 19.12,18.75 16.42,16.05 13.58,16.05 12.95,16.68 v9.08,16.68
EPD_RST  (via drill 0.2)
  Top 0.15: v11.6,10.95 18.01,10.95 18.38,10.58 v18.38,10.34 | v8.42,16.24 7.68,16.24 J1.10 | v27.55,17.37 32.82,17.37 33.45,18 34.85,18 v34.87,17.97 | U$1.P$AC11 v37.61,20.94 | v37.61,20.94
  Bottom 0.15: v8.42,16.24 10.42,16.24 11.26,15.4 11.26,11.29 v11.6,10.95 | v18.38,10.34 19.01,9.72 24.5,9.72 26.4,11.63 26.4,14 26.26,14.15 26.26,15.77 25.77,16.25 25.77,17.94 26.05,18.21 26.7,18.21 v27.55,17.37 | v34.87,17.97 35.15,18.25 35.81,18.25 36.57,19.01 37.5,19.01 37.85,19.35 37.85,20.7 v37.61,20.94
GDR
  Top 0.15: 13.77,12.24 18.87,12.24 Q3.1 | 13.77,12.24 R2_EP_DR.2 | J1.2 13.76,12.25 13.77,12.24
GND  (via drill 0.2, 0.3)
  Top 0.15: 10.19,9.88 C24.1 | C29.2 12.61,5.66 13.65,5.66 15.73,7.74 15.73,8.64 14.48,9.88 11.23,9.88 C39.2 11.16,9.95 10.26,9.95 C24.1 | J1.MP1 10.33,10.92 10.33,10.02 C24.1 | IC2.B3 6.17,5.31 v5.69,5.31 4.3,5.31 C32.2 | v7.7,5.31 7.21,5.31 IC2.B1 | v8.39,19.72 7.7,19.72 J1.17 | C23.1 9.16,9.78 v8.23,9.78 | C33.2 10.95,29.34 C25.2 10.88,29.34 10.12,29.34 8.25,27.47 | C27.2 6.93,28.86 6.93,28.16 6.8,28.03 C37.2 | IC1.D2 7.83,31.35 6.31,31.35 R9.1 6.24,31.35 5.89,31.35 | 5.89,31.35 3.96,31.35 3.2,32.11 2.16,32.11 1.46,31.42 1.46,27.61 2.16,26.92 GND.TP 2.23,26.92 3.26,27.96 6.73,27.96 C37.2 | 8.25,27.47 7.42,27.47 6.86,28.03 C37.2 | R2_EP_DR.1 14.92,13.08 14.5,13.5 14.1,13.7 EPD_C2.1 13.79,13.76 13.79,14.66 EPD_C1.1 13.72,14.73 13.24,15.21 | 13.24,15.21 8.39,15.21 | 8.39,15.21 7.7,15.21 J1.8 | 13.24,15.21 13.24,15.56 13.58,15.91 13.58,17.09 EPD_C5.1 13.65,17.15 13.65,17.91 13.72,17.98 C1-EP-DR.2 13.79,18.05 13.79,18.95 13.93,19.09 EPD_C6.1 14,19.16 14,20.27 EPD_C7.1 14,20.34 14,21.45 EPD_C8.1 13.93,21.52 13.93,22.62 EPD_C10.1 14,22.76 14,23.87 EPD_C12.1 13.93,23.94 13.3,24.56 12.2,24.56 11.71,24.08 10.33,24.08 J1.MP2 10.33,24.15 8.25,26.23 8.25,27.47 | v8.39,15.15 8.39,15.21 | J2.3 40.52,13.28 39.34,13.28 J2.5 39.27,13.21 38.79,13.21 38.03,12.45 37.75,12.45 37.2,11.89 37.2,5.24 37.68,4.76 BAT_GND.TP 37.13,5.24 36.16,4.27 35.47,4.27 SW_UP.1 35.4,4 35.4,4.27 34.56,5.1 34.56,5.45 C30.2 34.49,5.52 v34.49,6.21 | IC3.8 27.29,8.64 27.29,8.15 IC3.9 27.22,8.22 v26.74,8.22 | v26.53,7.11 26.12,7.11 25.98,6.97 C34.2 25.84,7.04 25.15,7.04 C12.2 25.08,6.97 25.08,6.49 24.25,5.66 R3.1
  Top 0.15: R3.1 24.18,5.59 23.48,5.59 C31.2 23.41,5.59 23.28,5.59 22.72,5.04 21.34,5.04 18.67,7.7 | R3.1 24.18,5.52 24.18,4.2 24.39,4 SW_ENT.1 | 20.92,8.5 19.47,8.5 18.67,7.7 | 20.92,8.5 C14.2 | 18.67,7.7 18.08,7.11 C6.2 18.01,7.04 18.01,6.28 17.81,6.07 C8.2 17.81,5.94 17.81,5.17 C7.2 17.81,5.04 C19.2 17.81,4.13 18.36,3.58 18.36,1.23 17.6,0.46 16.63,0.46 15.87,1.23 15.87,1.99 13.93,3.93 13.44,3.93 SW_DN.1 | 27.11,22.95 27.02,23.04 D4.1 | 27.11,22.95 28.75,21.31 30.89,21.31 31.59,22 32.76,22 C20.2 | R_TYPE_SEL.1 22.31,26.43 22.31,26.57 21.61,27.26 21.34,27.26 R2_USB.2 21.27,27.33 21.06,27.33 19.81,28.58 19.81,28.93 J4.A12_B1 19.75,28.99 19.26,28.99 19.26,28.93 18.22,27.89 18.22,26.64 SJ1.1 | R1_USB.1 24.25,27.26 24.66,26.85 24.87,26.85 C42.2 24.94,26.78 24.94,26.77 | 26.04,25.67 C21.2 26.12,25.63 27.14,25.63 C43.2 28.24,25.64 C38.2 | C17.1 32.63,26.43 32.63,26.85 32.76,26.99 32.76,27.68 C5.2 32.7,27.61 31.52,27.61 U3.6 31.45,27.68 30.82,27.68 30.62,27.89 U3.9 | U3.9 30.55,27.89 29.86,27.2 29.58,27.2 U3.4 29.5,27.07 28.23,25.8 C38.2 | U3.1 29.58,28.65 29.86,28.65 30.55,27.96 U3.9 | C18.1 32.83,23.04 32.97,23.04 33.25,23.32 33.25,23.87 32.7,24.43 28.58,24.43 27.11,22.95 | C38.2 28.05,25.61 28.05,25.54 26.95,24.44 D4.1 | D4.1 26.95,23.53 | IC9.B1 15.24,29.41 14.97,29.41 IC9.C1 14.9,29.34 14.9,29.06 IC9.C2 14.9,28.65 IC9.C3 14.83,28.58 14.83,27.47 | 14.83,27.47 14,26.64 EPD_C9.1 | SJ1.1 18.29,26.43 18.29,26.3 18.98,25.6 18.98,20.82 EPD_C11.1 19.05,20.75 19.05,17.15 20.92,15.28 20.92,8.5 | 14.83,27.47 14.83,27.4 15.66,26.57 18.22,26.57 SJ1.1 | 36.37,25.53 36.57,25.74 36.57,26.43 U$1.P$B7
  Top 0.15: U$1.P$F23 40.8,25.26 40.17,25.26 39.97,25.46 U$1.P$74 36.37,25.53 | C13.2 39.45,28.23 39.9,28.23 C11.2 39.83,28.51 39.83,29.9 | 41.49,33.43 44.05,30.87 44.05,30.73 C4.2 44.12,30.66 44.12,29.96 C22.2 44.12,29.13 C2.2 44.12,29.06 44.26,28.93 44.26,27.96 X1.2 44.67,28.32 v45.39,28.32 | C10.2 43.43,23.94 44.19,23.94 C16.2 | C15.2 45.3,23.73 44.4,23.73 44.26,23.87 C16.2 | C16.2 44.05,23.87 44.05,23.11 C3.2 44.05,23.04 44.05,22.49 v43.91,22.49 44.89,22.49 44.9,22.5 45.11,22.3 C9.2 | v42.6,25.26 43.36,25.26 C1.2 | v42.32,26.71 42.53,26.5 43.08,26.5 X1.4 | 27.29,29.55 26.74,28.99 26.25,28.99 J4.A1_B12 | 27.36,29.62 29.09,31.35 29.91,31.35 D3.2 | 36.37,25.53 U$1.P$75 | 5.89,31.35 5.89,32.11 7.97,34.19 18.15,34.19
  Bottom 0.15: 26.74,7.6 26.74,7.32 v26.53,7.11 | 26.74,7.6 v26.74,8.22 | v34.49,6.21 33.11,7.6 26.74,7.6 | 41.97,24.43 40.65,23.11 39.97,23.11 U$1.P$86 | v42.32,26.71 42.32,25.6 42.6,25.32 v42.6,25.26 41.87,24.53 41.97,24.43 | 41.97,24.43 v43.91,22.49
  pour Route2 (isolate 0.305): 35.62,35.07 32.27,38.42 -1.52,38.42 -1.54,38.44 -1.62,38.52 -1.62,-0.07 -0.27,-1.42 48.17,-1.42 48.52,-1.07 48.52,35.52 48.44,35.44 48.42,35.42 41.83,35.42 41.18,34.77 41.18,30.88 41.16,30.86 41.14,30.84 41.12,30.82 35.88,30.82 35.86,30.84 35.64,31.06 35.62,31.08
  pour Top: 35.94,31.2 35.86,31.12 35.82,31.1 35.78,31.1 35.74,31.12 35.72,31.14 35.7,31.18 35.7,35.16 32.36,38.5 -1.7,38.5 -1.7,-0.16 0.14,-2 47.86,-2 48.6,-1.26 48.6,35.16 48.36,35.4 41.6,35.4 41.6,35.18 41.58,35.14 41.2,34.76 41.2,31.28 41.18,31.24 41.16,31.22 41.12,31.2
  pour Bottom: -1.82,38.83 -1.87,38.78 -1.9,38.77 -1.9,38.77 -1.9,-0.27 -0.11,-2.06 47.57,-2.06 48.79,-0.84 48.79,35.08 48.58,35.28 41.58,35.28 41.55,35.3 41.41,35.43 41.41,31.99 41.4,31.96 40.88,31.43 40.85,31.42 35.81,31.42 35.75,31.37 35.73,31.36 35.7,31.36 35.67,31.37 35.65,31.39 35.64,31.42 35.64,35.01 32.07,38.58 -1.55,38.58 -1.58,38.59 -1.82,38.83
HAPTIC_EN  (via drill 0.2, 0.3)
  Top 0.15: v7.14,7.04 7.49,7.04 8.18,6.35 8.18,5.17 7.83,4.83 7.21,4.83 IC2.A1 | U$1.P$U1 34.57,22.45 34.46,22.34 34.46,21.8 34.18,21.52 31.57,21.52 29.37,19.32 v25.88,19.32
  Bottom 0.15: v7.14,7.04 7.42,7.32 7.42,19.37 8.25,20.2 8.53,20.2 8.87,19.85 8.87,19.58 7.97,18.68 7.97,18.05 8.32,17.71 12.34,17.71 13.72,16.32 16.28,16.32 19.25,19.29 25.59,19.29 25.62,19.32 v25.88,19.32
IMU_INT1  (via drill 0.3)
  Top 0.15: U$1.P$N1 34.81,23.45 v34.26,22.9 | v28.75,9.68 28.4,9.33 28.4,9.19 IC3.5
  Bottom 0.15: v34.26,22.9 34.26,19.75 28.75,14.25 v28.75,9.68
IMU_INT2  (via drill 0.2)
  Top 0.15: v26.77,15.41 26.54,15.64 26.54,17.56 26.85,17.88 31.41,17.88 31.83,18.3 v32.06,18.3 | IC3.6 27.8,9.22 v27.8,9.7 | U$1.P$P2 35.28,23.13 v35.23,23.13
  Bottom 0.15: v27.8,9.7 26.76,10.74 26.76,15.39 v26.77,15.41 | v32.06,18.3 33.12,19.36 33.46,19.36 33.8,19.7 33.8,19.8 33.96,19.96 33.96,22.35 33.56,22.75 33.56,23.22 33.81,23.48 34.88,23.48 v35.23,23.13
LX1  (via drill 0.2)
  Top 0.127: L7.1 16.58,31.93
  Top 0.15: v17.5,29.64 17.5,28.68 v16.7,27.88 | v15.32,27.77 15.3,27.79 IC9.B3 IC9.B2 | 16.58,31.93 v16.58,30.66
  Bottom 0.127: v16.58,30.66 16.85,30.66 17.5,30 v17.5,29.64
  Bottom 0.15: v16.7,27.88 16.59,27.77 v15.32,27.77
LX2  (via drill 0.2)
  Top 0.127: IC9.D2 IC9.D3
  Top 0.15: L7.2 14.27,30.66 14.61,30.32 v14.64,30.32 | v13.25,27.65 13.54,27.94 14.12,27.94 14.5,28.33 IC9.D3 | v8.65,28.92 9.7,29.97 v9.75,29.97
  Bottom 0.127: 13.02,29.97 13.07,30.03
  Bottom 0.15: 13.07,30.03 13.24,30.2 14.52,30.2 v14.64,30.32 | v8.65,28.92 9.38,28.19 9.38,26.99 12.95,26.99 13.25,27.29 v13.25,27.65 | v9.75,29.97 13.02,29.97
MOSI  (via drill 0.2)
  Top 0.15: J1.14 9.05,18.25 v9.09,18.29 | v9.21,19.27 9.35,19.41 v10.47,19.41 | v15.32,22.11 15.32,23.27 15.32,23.3 v15.35,23.33 | U$1.P$B13 v38.1,26.46 | v38.03,27.69 36.98,28.74 36.1,28.74 v36.02,28.66 | v14.82,25.53 17.31,25.53 v18.26,24.58 v18.27,24.58 | v22.82,25.32 23.21,25.71 24.93,25.71 v25.12,25.9 | v30.67,29.63 31.16,29.63 31.44,29.34 32.25,29.34 32.26,29.35 32.31,29.35 32.84,28.82 34.22,28.82 34.73,28.3 v34.73,28.19
  Bottom 0.15: v9.09,18.29 9.09,19.16 v9.21,19.27 | v10.47,19.41 13.53,19.41 14.37,18.57 14.66,18.57 16.47,20.38 16.47,20.97 v15.32,22.11 | v38.1,26.46 38.1,27.62 v38.03,27.69 | v15.35,23.33 14.82,23.87 v14.82,25.53 | v18.27,24.58 22.14,24.58 22.82,25.25 v22.82,25.32 | v25.12,25.9 25.84,25.9 26.4,26.45 29.77,26.45 30.15,26.83 30.15,29.34 30.43,29.63 v30.67,29.63 | v34.73,28.19 35.2,28.66 v36.02,28.66
N$1
  Top 0.15: U$1.P$C1 33.8,25.95 33.46,26.3 33.46,27.68 C5.1
N$2
  Top 0.15: U$1.P$D2 35.33,25.67 35.05,25.67 34.98,25.6 32.76,25.6 32.63,25.74 C17.2 32.1,25.17 30.12,25.17 X2.1
N$3
  Top 0.15: IC1.D1 7.83,31.84 6.31,31.84 R9.2
N$4  (via drill 0.3)
  Top 0.15: v33.04,24.77 33.53,25.26 35.33,25.26 U$1.P$F2 | C18.2 32.76,23.66 32.49,23.94 v32.21,23.94 32.14,23.94 30.89,22.69 30.13,22.69 X2.2
  Bottom 0.15: v32.21,23.94 v33.04,24.77
N$5
  Top 0.15: U$1.P$B3 35.6,28.02 34.5,29.12 L2.1
N$6
  Top 0.15: IC9.D1 14.48,29.41 14.48,29.68 10.39,33.77 9.7,33.77 R4.2
N$7
  Top 0.15: U$1.P$AC5 36.08,20.83 33.73,20.83 33.59,20.96 32.83,20.96 C20.1
N$8
  Top 0.15: IC9.E1 14.07,29.41 12.96,29.41 12.34,28.79 10.54,28.79 10.4,28.65 10.4,27.37 12.93,24.84 15.29,24.84 15.38,24.75 15.38,24.26 15.37,24.25 15.37,24.22 16.37,23.22 16.37,22.47 16.63,22.22 16.87,22.22 17.17,21.91 17.17,18.27 20.65,14.8 20.65,11.34 16.98,7.67 16.07,7.67 13.44,5.04 10.47,5.04 9.63,5.87 R1.2
N$10  (via drill 0.3)
  Top 0.15: v26.53,5.66 24.8,5.66 R3.2 | v28.82,7.11 28.82,7.6 IC3.1
  Bottom 0.15: v26.53,5.66 27.36,5.66 v28.82,7.11
N$11
  Top 0.15: L3.1 37.54,29.83 36.16,29.83 L2.2
N$12
  Top 0.15: U$1.P$A18 39.35,27.23 39.12,27.46 38.8,27.46 38.6,27.66 C13.1
N$13
  Top 0.15: U$1.P$A23 40.87,26.99 41,26.99 41.56,27.54 42.74,27.54 43.08,27.89 X1.3 43.15,27.96 43.43,28.23 43.43,29.06 C2.1
N$14
  Top 0.15: 43.71,25.74 42.67,25.74 41.97,26.43 41.35,26.43 U$1.P$B24 | 43.71,25.74 43.98,25.46 43.98,25.32 C1.1 | X1.1 44.26,26.43 44.26,26.23 43.77,25.74 43.71,25.74
N$15
  Top 0.15: 43.5,30.38 43.5,30.66 C4.1 | 43.5,30.38 43.5,29.96 C22.1 | 43.5,30.38 42.53,30.38 L1.2 42.46,30.38 40.45,30.38 38.23,32.6 ANT1.1
N$16  (via drill 0.3)
  Top 0.15: 41.35,24.77 41.7,24.77 43.36,23.11 C3.1 | 41.35,24.77 41.01,24.77 40.94,24.7 40.87,24.7 U$1.P$H23 | v41.35,29.27 42.46,29.27 L1.1 | v41.35,24.91 41.35,24.77
  Bottom 0.15: v41.35,24.91 v41.35,29.27
N$17
  Top 0.15: C2-EP-DR.2 22.45,18.4 22.45,18.19 22.93,17.71 22.93,15.91 22.38,15.35 D5.2 22.38,15.28 23.69,13.97 | 23.69,13.97 23.97,14.25 L5.1 23.69,13.97 | 23.69,13.97 21.89,12.17 21.75,12.17 Q3.3
N$18
  Top 0.15: D4.2 23.41,23.04 21.55,23.04 D2.1 20.99,22.64 20.99,16.84 21.45,16.38 21.85,16.38 22.4,16.93 C2-EP-DR.1
N$19
  Top 0.15: U$1.P$N24 41.4,23.4 42.6,23.4 42.9,23.1 42.9,22.7 43.3,22.3 43.39,22.3 43.94,21.8 C9.1
N$20
  Top 0.15: R_TYPE_SEL.2 21.82,26.43 21.34,26.43 R1_EP_DR.1 21.27,26.5 19.81,26.5 SJ1.2
N$21
  Top 0.15: J1.24 7.7,23.32 12.06,23.32 12.61,23.87 EPD_C12.2
N$22
  Top 0.15: J1.18 7.7,20.2 11.57,20.2 12.61,19.16 EPD_C6.2
N$23
  Top 0.15: R1_USB.2 24.25,27.89 24.25,28.93 J4.A5
N$24  (via drill 0.3)
  Top 0.15: v6.24,4.2 6.66,4.62 6.66,4.76 IC2.A2 | v5,4.48 4.58,4.48 4.3,4.2 C32.1
  Bottom 0.15: v6.24,4.2 5.27,4.2 v5,4.48
N$25
  Top 0.15: J1.22 7.7,22.28 12.2,22.28 12.61,22.69 EPD_C10.2
N$26
  Top 0.15: R2_USB.1 21.27,27.89 21.27,28.93 J4.B5
N$27
  Top 0.15: J1.20 7.7,21.31 12.47,21.31 12.61,21.45 EPD_C8.2
N$28
  Top 0.15: J1.19 7.7,20.69 12.27,20.69 12.61,20.34 EPD_C7.2
N$29
  Top 0.15: EPD_C2.2 12.61,13.69 8.46,13.69 8.04,13.28 7.7,13.28 J1.4
N$32
  Top 0.15: EPD_C1.2 12.61,14.66 8.87,14.66 7.97,13.76 7.7,13.76 J1.5
OUT+
  Top 0.3: IC2.A3 6.17,4.76 6.03,4.76 5.41,4.13 5.41,2.06 OP.TP
OUT-
  Top 0.3: IC2.C3 6.17,5.87 1.6,5.87 ON.TP
P0.13
  Top 0.15: U$1.P$AD8 36.87,20.43 36.72,20.28 36.72,19.68 36.89,19.5 37.2,19.5 37.51,19.19 37.51,14.7 32.83,10.02 32.83,5.52 | 32.83,5.52 32.83,5.45 R5.1 32.76,5.38 32.63,5.24 32.63,4 SW_UP.2 | 32.83,5.52 33.39,5.52 C30.1
P0.14  (via drill 0.2, 0.3)
  Top 0.15: C31.1 22.31,5.59 22.17,5.45 21.61,5.45 R8.1 21.55,5.45 21.41,5.59 21.34,5.59 21.06,5.87 v21.06,5.94 | v22.38,3.16 21.61,3.93 SW_ENT.2 21.55,4 20.16,5.38 v20.16,5.59 | v36.6,20.92 37.07,20.92 U$1.P$AC9 | v36.18,19.63 36.24,19.57 36.24,17.34 35.96,17.07 35.97,17.06 35.97,16.09 35.99,16.07 v35.99,15.72 | v31.53,8.22 29.79,6.48 29.79,4.13 29.54,3.89 v29.4,3.89
  Bottom 0.15: v21.06,5.94 20.51,5.94 v20.16,5.59 | v22.38,3.16 23.07,3.16 23.72,3.81 29.32,3.81 v29.4,3.89 | v36.6,20.92 36.3,20.62 36.3,19.75 v36.18,19.63 | v35.99,15.72 35.99,10.18 36,10.17 34.08,8.26 31.56,8.26 v31.53,8.22
P1.01  (via drill 0.2)
  Top 0.15: Q1.1 31.93,13.55 32.76,14.38 32.76,14.66 R_PWR_EPD.1 32.85,14.72 33.76,15.63 v34.8,15.63 | U$1.P$Y23 v40.85,20.97
  Bottom 0.15: v34.8,15.63 34.8,16.82 36.54,18.56 38.61,18.56 40.85,20.8 v40.85,20.97
P1.02  (via drill 0.3)
  Top 0.15: U$1.P$W24 41.35,21.93 43.3,21.93 43.5,21.73 R7.1 43.89,21.15 44.12,20.92 v44.12,20.62 | v10.74,5.59 11.44,5.59 C29.1 | v9.98,4.83 9.98,4.55 10.54,4 SW_DN.2
  Bottom 0.15: v9.98,4.83 v10.74,5.59 10.81,5.59 12.06,4.34 39.55,4.34 44.67,9.47 44.67,15.77 44.12,16.32 v44.12,20.62
PMIC_INT  (via drill 0.2)
  Top 0.15: IC1.A1 10.1,31.8 10.5,32.2 v10.5,32.9 | v17.49,32.97 17.49,31.03 v17.39,30.94 | v22.6,27.69 23.17,27.13 v23.17,26.71 | U$1.P$T2 35.35,22.37 v35.24,22.26 | v27.58,18.34 v30.45,18.34 v30.46,18.33 | v29.91,16.89 32.54,16.89 v32.82,16.61
  Bottom 0.15: v10.5,32.9 10.9,33.3 12.88,33.3 13.29,33.71 17.17,33.71 17.67,33.2 17.67,33.16 v17.49,32.97 | v17.39,30.94 19.46,30.94 19.69,30.71 20.75,30.71 21.4,30.07 21.4,28.9 v22.6,27.69 | v23.17,26.71 23.74,26.14 23.74,25.02 24.38,24.39 25.11,24.39 26.72,22.78 26.72,19.2 v27.58,18.34 | v30.46,18.33 30.46,17.44 v29.91,16.89 | v32.82,16.61 33.85,17.63 33.85,18.94 35.33,20.43 35.33,22.16 v35.24,22.26
PREVGH  (via drill 0.3)
  Top 0.3: v8.9,21.79 7.7,21.79 J1.21 | v12.85,25.54 12.85,26.4 12.68,26.57 EPD_C9.2 | v14.69,19.51 18.84,15.35 D5.1
  Bottom 0.3: v12.85,25.54 12.75,25.54 10.53,23.32 | v8.9,21.79 10.48,23.37 10.53,23.32 | v14.69,19.51 14.34,19.51 10.53,23.32
PREVGL  (via drill 0.3)
  Top 0.3: v11.92,22.76 7.7,22.76 J1.23 | 17.67,22.76 v16.84,22.76 | 17.67,22.76 17.95,23.04 D2.2 | EPD_C11.2 17.74,20.82 17.74,22.62 17.67,22.76
  Bottom 0.3: v16.84,22.76 v11.92,22.76
RESE  (via drill 0.3)
  Top 0.15: v21.41,13.34 21.41,15.21 20.65,15.98 20.65,23.59 21.27,24.22 21.27,25.88 R1_EP_DR.2 | v20.16,12.1 20.16,11.96 19.68,11.47 Q3.2 | v13.37,12.73 7.69,12.73 J1.3
  Bottom 0.15: v21.41,13.34 v20.16,12.1 20.09,12.1 18.68,13.51 14.15,13.51 v13.37,12.73
RESET  (via drill 0.2)
  Top 0.043: U$1.P$AC13 38.1,19.7
  Top 0.15: 38.44,9.3 38.44,7.53 40.24,5.73 40.24,2.61 41,1.85 41.97,1.85 43.77,3.65 43.77,5.38 RESET.TP | 38.44,9.3 38.44,10.71 39.27,11.54 39.27,11.96 J2.6 | 38.1,19.7 38.8,19 v38.8,17.1 | 38.44,9.3 39.1,8.64 v39.1,8.3
  Bottom 0.15: v39.1,8.3 38.5,8.3 36.41,10.39 36.41,17.01 36.5,17.1 v38.8,17.1
SCK  (via drill 0.3)
  Top 0.15: v34.91,31.14 34.91,31.3 32.92,33.29 28.41,33.29 26.95,31.84 18.9,31.84 16.62,29.56 v16.24,29.56 | v10.58,18.18 10.18,17.78 7.7,17.78 J1.13 | v36.65,28.1 37.01,28.1 37.85,27.26 U$1.P$A12
  Bottom 0.15: v36.65,28.1 36.65,29.41 v34.91,31.14 | v16.24,29.56 16.04,29.56 8.32,21.83 8.32,20.82 10.23,18.91 10.23,18.52 v10.58,18.18
SCL  (via drill 0.2, 0.3)
  Top 0.15: v7.63,6.28 7.21,5.87 IC2.C1 | v8.87,7.53 14.27,7.53 14.62,7.87 15.24,7.87 R17.2 | 8.73,32.39 8.73,33.43 9.08,33.77 R4.1 | 8.73,32.39 8.73,31.84 IC1.B1 | 28.33,4.83 28.33,2.06 SCL.TP | 28.33,4.83 28.33,6.63 | 28.33,6.63 28.33,7.6 IC3.12 | v33.11,28.3 32.97,28.16 31.52,28.16 U3.7 | v35.6,19.09 35.6,13.28 28.95,6.63 28.33,6.63 | v9.15,32.39 8.73,32.39 | v28.26,4.83 28.33,4.83 | v35.62,23.75 35.56,23.7 U$1.P$M2
  Bottom 0.127: v35.6,19.09 35.6,23.74 v35.62,23.75
  Bottom 0.15: v7.63,6.28 v8.87,7.53 13.03,7.53 15.73,4.83 v28.26,4.83 | v33.11,28.3 33.11,27.89 33.42,27.58 | 33.42,27.58 34.7,26.29 34.7,24.67 v35.62,23.75 | v9.15,32.39 9.28,32.39 9.4,32.51 33.68,32.51 34.43,31.77 34.43,30.66 31.8,28.03 31.8,26.99 32.14,26.64 32.49,26.64 33.42,27.58
SDA  (via drill 0.2, 0.3)
  Top 0.127: IC2.B2
  Top 0.15: R18.2 7,7.6 7.35,7.6 9.01,5.94 R1.1 | 8.05,1.86 7.83,1.64 SDA.TP | 8.05,1.86 9.01,2.82 9.01,5.87 R1.1 | v8.25,32.32 8.25,31.84 IC1.C1 | v26.95,28.16 28.12,28.16 28.95,28.99 31.17,28.99 31.45,28.72 U3.8 | v29.86,21.79 30.96,21.79 31.73,22.55 33.42,22.55 33.68,22.82 33.68,23.44 34.19,23.94 U$1.P$L1 | v28.26,8.57 28.68,8.15 28.82,8.15 IC3.2 | v14.48,7.11 10.12,7.11 9.01,6.01 R1.1 | v7.45,3.46 8.05,2.86 8.05,1.86 | IC2.B2 v6.7,5.29
  Bottom 0.15: v8.25,32.32 8.25,31.35 7.77,30.87 7.77,30.54 8.88,29.43 8.88,29.38 15.16,29.38 16.03,30.26 16.33,30.26 19.64,26.95 22.73,26.95 23.52,27.74 25.16,27.74 | v14.48,7.11 15.52,7.11 16.01,6.63 24.52,6.63 26.6,8.71 28.19,8.71 v28.26,8.57 28.26,17.64 29.86,19.23 v29.86,21.79 29.78,21.72 28.73,21.72 25.62,24.83 24.58,24.83 24.05,25.37 24.05,26.63 25.16,27.74 | v6.7,5.29 6.95,5.03 6.95,3.91 7.4,3.46 v7.45,3.46 | 25.16,27.74 25.58,28.16 v26.95,28.16
SWDCLK  (via drill 0.3)
  Top 0.15: v41.84,21.45 U$1.P$AA24 | v41.14,12.58 40.59,12.03 J2.4 | v38.93,6.42 38.93,1.92 SWDCLK.TP
  Bottom 0.15: v41.84,21.45 41.84,15.98 41.49,15.63 41.49,12.93 v41.14,12.58 41.14,12.51 41.49,12.17 41.49,9.47 38.93,6.9 v38.93,6.42
SWDIO
  Top 0.15: U$1.P$AC24 41.35,20.89 41.96,20.89 42.72,20.13 44.81,20.13 45.51,19.44 45.51,13.83 43.43,11.75 42.11,11.75 41.91,11.96 J2.2 42.11,11.68 41.56,11.13 41.56,3.16 SWDIO.TP
SWO
  Top 0.15: U$1.P$AD22 40.38,20.41 40.52,20.27 40.52,20.2 41.77,18.95 44.26,18.95 SWO.TP
VBAT  (via drill 0.3)
  Top 0.3: U3.3 29.51,27.68 29.51,28.09 U3.2 29.37,28.16 v28.75,28.16 | 8.32,30.64 8.32,29.62 7.63,28.93 C27.1 7.7,28.79 7.83,28.65 7.83,28.03 C37.1 | 8.32,30.64 8.32,30.87 | 8.32,30.87 8.32,31.35 IC1.C2 | v8.4,30.64 8.32,30.64 | 8.32,30.87 2.71,30.87 VBAT.TP
  Bottom 0.3: v8.4,30.64 9.74,31.97 33.66,31.97 34.01,31.63 34.01,31.21 33.66,30.87 29.43,30.87 28.71,30.15 28.71,28.2 v28.75,28.16
VBUS  (via drill 0.3)
  Top 0.2: U$1.P$AD2 35.19,20.29 v31.59,20.29
  Top 0.203: 9.48,31.02 IC1.A2
  Top 0.3: 25.29,27.4 24.94,27.4 C42.1 | 25.29,27.4 25.82,26.86 C21.1 26.2,26.65 27.06,26.65 C43.1 28.23,26.75 C38.1 28.05,27.21 v28.05,27.54 | J4.A4_B9 25.35,28.93 25.35,27.54 25.29,27.4 | v11.99,31.35 11.66,31.02 9.48,31.02 | v19.81,31.35 20.85,30.31 20.85,29.76 20.65,29.55 20.65,28.99 J4.A9_B4 | v33.46,31.42 32.52,31.42 D3.5
  Bottom 0.25: 31.69,22.96 31.69,21.61
  Bottom 0.253: 30.8,23.84 31.69,22.96
  Bottom 0.3: v11.99,31.35 12.11,31.47 19.69,31.47 v19.81,31.35 19.95,31.28 27.36,31.28 28.19,30.45 | v31.59,20.29 31.59,20.82 31.5,20.91 31.5,21.42 31.69,21.61 | 28.19,30.45 28.19,27.68 v28.05,27.54 27.81,27.29 25.54,27.29 24.5,26.25 24.5,25.51 24.82,25.19 26.06,25.19 26.39,25.52 27.12,25.52 28.19,24.45 28.19,24.22 28.57,23.84 30.8,23.84 | v33.46,31.42 29.23,31.42 28.33,30.52 28.19,30.45
VREG  (via drill 0.2, 0.3)
  Top 0.15: 8.7,31.32 9.06,30.96 9.06,30.84 9.3,30.6 v12.5,30.6 | v15.33,30.59 15.7,30.22 IC9.A1
  Top 0.2: 9.17,8.86 8.94,9.1 C23.2 5.96,9.19 5.34,9.26 | 8.7,31.32 IC1.B2
  Top 0.3: 9.17,8.86 10.2,8.86 C24.2 10.33,8.98 11.09,8.98 C39.1 11.23,8.91 11.71,9.4 v12.2,9.4 | 15.73,28.99 15.73,28.65 | 15.73,28.65 IC9.A3 | 15.73,28.99 IC9.A2 | 15.73,28.99 15.73,29.34 IC9.A1 | v15.8,27.06 15.8,28.51 15.73,28.65 | v14.41,15.08 v16.14,16.81 | 5.34,9.26 VREG.TP
  Bottom 0.15: v15.33,30.59 15.13,30.79 12.69,30.79 v12.5,30.6
  Bottom 0.3: v15.8,27.06 15.8,26.37 17.51,24.66 17.51,18.17 v16.14,16.81 | v14.41,15.08 14.27,15.08 12.29,13.09 12.29,9.49 v12.2,9.4
(copper drawn outside any net)
  shapes: Bottom area x1